# EAGLE board Street_Fighter_v1.1 (EAGLE 7.5.0)
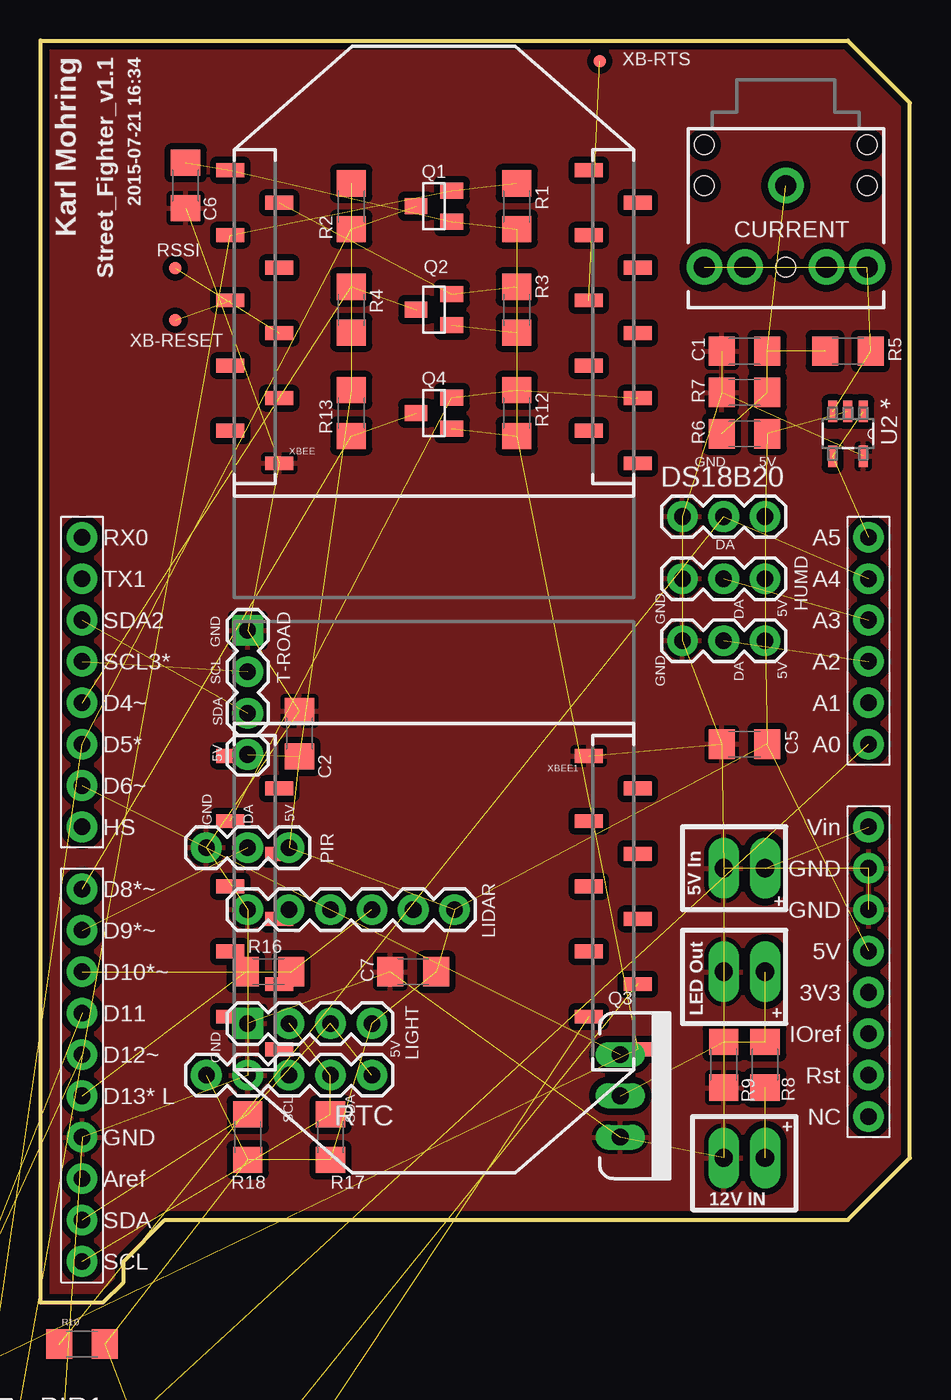
[diagram p0: board, top side]
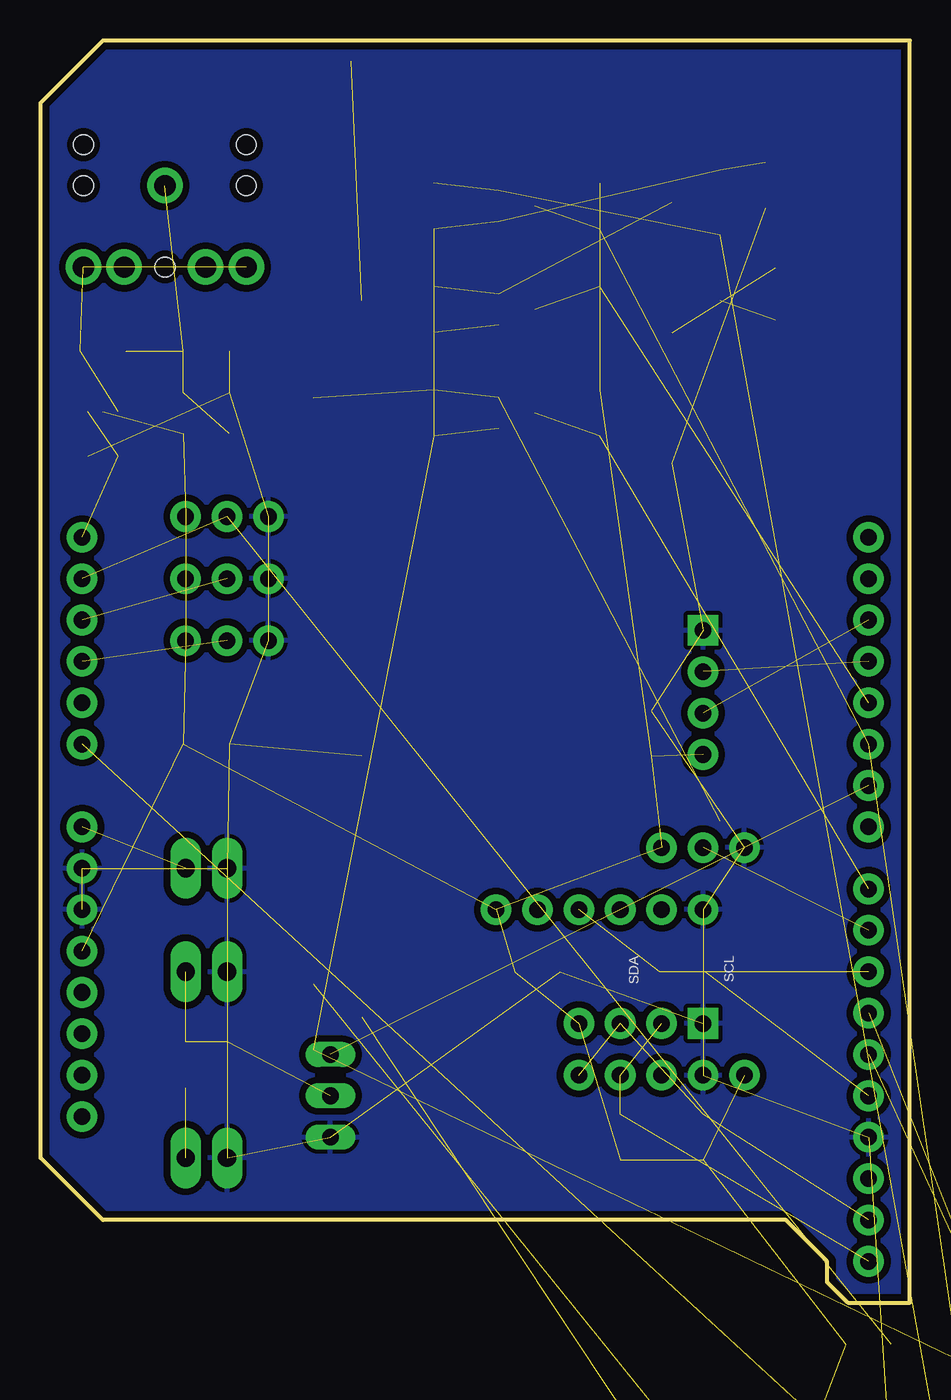
[diagram p1: board, bottom side, seen from below]

Size 53.34 x 77.47 mm. Coordinates in mm from the lower left corner, seen from the top.
Outline: 0,66.04 0,0
Outline: 0,0 3.81,0 5.08,1.27 5.08,2.54 7.62,5.08 49.53,5.08 53.34,8.89 53.34,73.66 49.53,77.47 0,77.47 0,0
Copper layers (1*16): Top 0.035mm / dielectric 1.5mm / Bottom 0.035mm
Design rules "ITEADstudio_DRC": minimum track width 6mil, minimum drill 12mil, track to track 6mil, track to pad 6mil, pad to pad 6mil, via to via 6mil, smd to smd 0mil, copper to edge 10mil, drill to drill 10mil, minimum pad ring 10mil, minimum via ring 6mil, stop-mask expansion 2mil, vias tented up to drill 100mil, thermal gap 10mil

## Footprints (pad centres in the part's own frame; a part is rotated, then mirrored left to right if it is on the bottom)
1206 = smd 1.6 x 1.8: 1 -1.4,0; 2 1.4,0
AUDIO-JACK = drill 1.3 pad 2.184: RING 5,5; RSH 5,2.5; SLEEVE 0,0; TIP 5,-5; TSH 5,-2.5 | hole 1.2: 0,5; -2.5,5; -2.5,-5; 0,-5; 5,0
1X03 = drill 1.016 pad 1.88: 1 0,0; 2 2.54,0; 3 5.08,0
2X3 = drill 1.016 pad 1.88 octagon: 1 0,0; 2 0,2.54; 3 2.54,0; 4 2.54,2.54; 5 5.08,0; 6 5.08,2.54
1X02_LONGPADS = drill 1.118 pad 1.88 long: 1 0,0; 2 2.54,0
1X06 = drill 1.016 pad 1.88: 1 0,0; 2 2.54,0; 3 5.08,0; 4 7.62,0; 5 10.16,0; 6 12.7,0
1X04 = drill 1.016 pad 1.88 square: 1 0,0 | drill 1.016 pad 1.88: 2 2.54,0; 3 5.08,0; 4 7.62,0
SOT23 = smd 1 x 1.4: 1 -0.95,-1.1; 2 0.95,-1.1; 3 0,1.1
TO220V = drill 1.016 long: 1 -2.54,0; 2 0,0; 3 2.54,0
PAD.03X.03 = smd 0.762 x 0.762: P$1 0,0
1X05 = drill 1.016 pad 1.88: 1 0,0; 2 2.54,0; 3 5.08,0; 4 7.62,0; 5 10.16,0
SJ_3_PASTE1&2 = smd 0.635 x 1.27: 1 -0.813,0; 2 0,0; 3 0.813,0
DUEMILANOVE_VIAS = drill 1.016 pad 1.88: 0 2.54,41.91; 1 2.54,39.37; 2 2.54,36.83; 2@1 2.54,0; 3 2.54,34.29; 3@1 2.54,-2.54; 3V3 50.8,13.97; 5 2.54,29.21; 5V 50.8,16.51; 6 2.54,26.67; 7 2.54,24.13; 8 2.54,20.32; 9 2.54,17.78; 10 2.54,15.24; 11 2.54,12.7; 12 2.54,10.16; 13 2.54,7.62; A0 50.8,29.21; A1 50.8,31.75; A2 50.8,34.29; A3 50.8,36.83; A4 50.8,39.37; A5 50.8,41.91; AREF 2.54,2.54; D4 2.54,31.75; GND 2.54,5.08; GND@0 50.8,19.05; GND@1 50.8,21.59; IOREF 50.8,11.43; NC 50.8,6.35; RESET 50.8,8.89; VIN 50.8,24.13
SOT95P270X145-5N = smd 1.321 x 0.559: 1 -1.372,0.94; 2 -1.372,0; 3 -1.372,-0.94; 4 1.372,-0.94; 5 1.372,0.94
SOT223 = smd 1.219 x 2.235: 1 -2.311,-3.099; 2 0,-3.099; 3 2.311,-3.099 | smd 3.6 x 2.2: 4 0,3.099
XBEE-SMD = smd 1.7 x 0.85: 1 -12.5,20; 2 -9.5,18; 3 -12.5,16; 4 -9.5,14; 5 -12.5,12; 6 -9.5,10; 7 -12.5,8; 8 -9.5,6; 9 -12.5,4; 10 -9.5,2; 11 12.5,2; 12 9.5,4; 13 12.5,6; 14 9.5,8; 15 12.5,10; 16 9.5,12; 17 12.5,14; 18 9.5,16; 19 12.5,18; 20 9.5,20

## Placement (x,y rotation side)
C1  10uF  [1206]  43.18,58.42 0 top
C2  10uF  [1206]  15.88,34.92 270 top
C3  10uF  [1206]  -5.08,-15.24 0 top  (outside the outline)
C4  0.1uF  [1206]  -5.08,-19.05 0 top  (outside the outline)
C5  10uF  [1206]  43.18,34.29 0 top
C6  10uF  [1206]  8.89,68.58 90 top
C7  10uF  [1206]  22.86,20.32 0 top
C8  10uF  [1206]  -5.08,-22.86 0 top  (outside the outline)
CURRENT  3.5mm Jack  [AUDIO-JACK]  45.72,68.58 270 top
DS18B20  TMP36  [1X03]  39.37,48.26 0 top
HUMD  HIH-4030  [1X03]  39.37,44.45 0 top
J1  FEMALE 2x3  [2X3]  -50.8,-71.12 0 top  (outside the outline)
JP2  LED Control  [1X02_LONGPADS]  41.91,20.32 0 top
JP3  Power input  [1X02_LONGPADS]  41.91,26.67 0 top
JP4  LED-Reference  [1X02_LONGPADS]  41.91,8.89 0 top
LIDAR  Lidar Lite  [1X06]  12.7,24.13 0 top
LIGHT  BH1750FVI  [1X04]  12.7,17.14 0 top
PIR  MOTION  [1X03]  10.16,27.94 0 top
PIR1  MOTION  [1X03]  1.27,-8.89 0 top  (outside the outline)
Q1  BSS138  [SOT23]  24.13,67.31 90 top
Q2  BSS138  [SOT23]  24.13,60.96 90 top
Q3  FQP30N06L  [TO220V]  35.56,12.7 270 top
Q4  BSS138  [SOT23]  24.13,54.61 90 top
Q5  BSS138  [SOT23]  -6.35,-27.94 0 top  (outside the outline)
Q6  BSS138  [SOT23]  -6.35,-40.64 0 top  (outside the outline)
Q7  BSS138  [SOT23]  -6.35,-53.34 0 top  (outside the outline)
Q8  BSS138  [SOT23]  -2.54,-53.34 0 top  (outside the outline)
Q9  BSS138  [SOT23]  -34.29,-66.04 0 top  (outside the outline)
Q10  BSS138  [SOT23]  -30.48,-66.04 0 top  (outside the outline)
R1  4.7K  [1206]  29.21,67.31 270 top
R2  4.7K  [1206]  19.05,67.31 90 top
R3  4.7K  [1206]  29.21,60.96 270 top
R4  4.7K  [1206]  19.05,60.96 270 top
R5  2K2  [1206]  49.53,58.42 0 top
R6  75K  [1206]  43.18,53.34 0 top
R7  75K  [1206]  43.18,55.88 0 top
R8  15K  [1206]  44.45,14.61 270 top
R9  75K  [1206]  41.91,14.61 90 top
R10  4.7K  [1206]  2.54,-2.54 0 top
R11  4.7K  [1206]  -5.08,-31.75 0 top  (outside the outline)
R12  4.7K  [1206]  29.21,54.61 270 top
R13  4.7K  [1206]  19.05,54.61 90 top
R14  4.7K  [1206]  -5.08,-35.56 0 top  (outside the outline)
R15  4.7K  [1206]  -5.08,-44.45 0 top  (outside the outline)
R16  1K  [1206]  13.97,20.32 0 top
R17  4K7  [1206]  17.78,10.16 270 top
R18  4K7  [1206]  12.7,10.16 270 top
R19  4.7K  [1206]  -5.08,-48.26 0 top  (outside the outline)
R20  4.7K  [1206]  -5.08,-57.15 0 top  (outside the outline)
R21  4.7K  [1206]  0,-57.15 0 top  (outside the outline)
R22  4.7K  [1206]  -5.08,-60.96 0 top  (outside the outline)
R23  4.7K  [1206]  0,-60.96 0 top  (outside the outline)
R24  4.7K  [1206]  -33.02,-69.85 0 top  (outside the outline)
R25  4.7K  [1206]  -27.94,-69.85 0 top  (outside the outline)
R26  4.7K  [1206]  -22.86,-69.85 0 top  (outside the outline)
R27  4.7K  [1206]  -33.02,-73.66 0 top  (outside the outline)
RSSI  TEST-POINT3  [PAD.03X.03]  8.26,63.5 0 top
RTC  DS1307  [1X05]  20.32,13.97 180 top
SJ1  [SJ_3_PASTE1&2]  -38.1,-72.39 0 top  (outside the outline)
SJ2  [SJ_3_PASTE1&2]  -41.91,-72.39 0 top  (outside the outline)
SOUND  MIC  [1X03]  39.37,40.64 0 top
T-ROAD  MLX90614-ACF  [1X04]  12.7,41.27 270 top
U1  ARDUINO_YUN_SHIELDYUN  [DUEMILANOVE_VIAS]  0,5.08 0 top
U2  MCP6231RT-E/OT  [SOT95P270X145-5N]  49.53,53.34 270 top
U3  [SOT223]  -5.08,-7.62 0 top  (outside the outline)
XB-RESET  TEST-POINT3  [PAD.03X.03]  8.26,60.33 0 top
XB-RTS  TEST-POINT3  [PAD.03X.03]  34.29,76.2 0 top
XBEE  XBEE-2B3  [XBEE-SMD]  24.13,49.53 0 top
XBEE1  XBEE-2B3  [XBEE-SMD]  24.13,35.56 180 top

## Library data of the parts
C1-C8 = SparkFun-Capacitors; PROD_ID: CAP-10057
CURRENT DS18B20 HUMD JP2-JP4 LIDAR LIGHT PIR PIR1 RTC SOUND T-ROAD = SparkFun-Connectors
J1 = SparkFun-Connectors; PROD_ID: CONN-11566
Q1 Q2 Q4-Q10 = SparkFun-DiscreteSemi; PROD_ID: TRANS-08345
Q3 = SparkFun-DiscreteSemi; PROD_ID: TRANS-10060
R1-R27 RSSI XB-RESET XB-RTS = SparkFun-Passives
SJ1 SJ2 = SparkFun-Retired
U1 = SparkFun-Boards
U2 = Microchip_By_element14_Batch_1; DESCRIPTION: OP AMP; MPN: MCP6231RT-E/OT; OC_FARNELL: 1840878; OC_NEWARK: 84R5186; PACKAGE: SOT-5; SUPPLIER: Microchip
U3 = SparkFun-PowerIC; PROD_ID: VREG-08170
XBEE XBEE1 = SparkFun-RF; PROD_ID: CONN-09042

## Nets
3V3: U1.3V3
+3V3: C3.2 C4.2 C6.2 Q1.1 Q2.1 Q4.1 Q5.1 Q6.1 Q7.1 Q8.1 Q9.1 Q10.1 R1.2 R3.2 R11.2 R12.2 R15.2 R20.2 R22.2 R24.2 R26.2 U3.2 U3.4 XBEE1.1 XBEE.1
+5V: C2.2 C5.2 C7.2 C8.2 DS18B20.3 HUMD.3 J1.2 LIDAR.6 LIGHT.4 PIR1.3 PIR.3 R2.2 R4.2 R6.2 R10.2 R13.2 R14.2 R17.2 R18.2 R19.2 R21.2 R23.2 R25.2 R27.2 RTC.5 SOUND.3 T-ROAD.4 U1.5V U2.2 U3.3
+12V: JP4.2 R8.2
CURRENT: U1.A5 U2.1 U2.4
GND: C1.1 C2.1 C3.1 C4.1 C5.1 C6.1 C7.1 C8.1 DS18B20.1 HUMD.1 J1.6 JP2.1 JP3.1 JP4.1 LIDAR.1 LIGHT.1 PIR1.1 PIR.1 Q3.3 R7.1 R9.1 RTC.4 SOUND.1 T-ROAD.1 U1.GND U1.GND@0 U1.GND@1 U2.5 U3.1 XBEE1.10 XBEE.10
HANDSHAKE: U1.7
HUMIDITY: HUMD.2 U1.A3
LED-CONTROL: Q3.1 U1.6
LED-CONTROL-OUT: JP2.2 Q3.2 R8.1 R9.2
LIDAR-PWM: LIDAR.4 R16.2 U1.10
LIDAR-TRIG: R16.1 U1.13
MIC: SOUND.2 U1.A2
MISO: J1.1
MOSI: J1.4
MOTION: PIR.2 U1.9
N$2: CURRENT.RING CURRENT.TIP R5.2 U2.3
N$3: SJ1.2
N$4: C1.2 CURRENT.SLEEVE R5.1 R6.1 R7.2
N$5: SJ2.2
RST: J1.5
RX-XB: Q2.3 R4.1 U1.D4
RX-XB2: Q10.3 R27.1 U1.11
RX-YUN: U1.0
SCK: J1.3
SCL: LIGHT.2 R17.1 RTC.2 U1.3@1
SCL@1: T-ROAD.2 U1.3
SDA: LIGHT.3 R18.1 RTC.1 U1.2@1
SDA@1: T-ROAD.3 U1.2
SONAR-PULSEIN: PIR1.2 U1.A0
SQW: RTC.3
TEMP: DS18B20.2 R10.1 U1.A4
TX-XB: Q1.3 Q5.3 Q6.3 Q7.3 Q8.3 R2.1 R14.1 R19.1 R21.1 R23.1 U1.5
TX-XB2: Q9.3 R25.1 U1.12
TX-YUN: U1.1
V+: JP3.2 U1.VIN
XB2-DIN: Q9.2 R24.1 XBEE1.3
XB2-DOUT: Q10.2 R26.1 XBEE1.2
XB2-RSSI: XBEE1.6
XB-ATTN: XBEE.19
XB-CLK: XBEE.18
XB-DTR: XBEE.9
XB-MISO: XBEE.4
XB-MOSI: XBEE.11
XB-RESET: XB-RESET.P$1 XBEE.5
XB-RSSI: RSSI.P$1 XBEE.6
XB-RTS: XB-RTS.P$1 XBEE.16
XB-RX3V: Q2.2 R3.1 XBEE.2
XB-SLEEP: Q4.3 R13.1 U1.8
XB-SLEEP3V: Q4.2 R12.1 XBEE1.13 XBEE.13
XB-SS: XBEE.17
XB-TX3V: Q1.2 Q5.2 Q6.2 Q7.2 Q8.2 R1.1 R11.1 R15.1 R20.1 R22.1 XBEE.3

## Tracks (layer width: path | path; a pad name or v marks a point on that pad's centre or on a via)
+3V3  (24 unrouted)
+5V  (29 unrouted)
+12V  (1 unrouted)
CURRENT  (2 unrouted)
GND  (30 unrouted)
  pour Top (isolate 0.406): 0,0 0,77.47 49.53,77.47 53.34,73.66 53.34,8.89 49.53,5.08 7.62,5.08 5.08,2.54 5.08,1.27 5.08,0
  pour Bottom (isolate 0.406): 0,0 0,77.47 49.53,77.47 53.34,73.66 53.34,8.89 49.53,5.08 7.62,5.08 6.35,3.81 6.35,0
HUMIDITY  (1 unrouted)
LED-CONTROL  (1 unrouted)
LED-CONTROL-OUT  (3 unrouted)
LIDAR-PWM  (2 unrouted)
LIDAR-TRIG  (1 unrouted)
MIC  (1 unrouted)
MOTION  (1 unrouted)
N$2  (3 unrouted)
N$4  (4 unrouted)
RX-XB  (2 unrouted)
RX-XB2  (2 unrouted)
SCL  (3 unrouted)
SCL@1  (1 unrouted)
SDA  (3 unrouted)
SDA@1  (1 unrouted)
SONAR-PULSEIN  (1 unrouted)
TEMP  (2 unrouted)
TX-XB  (10 unrouted)
TX-XB2  (2 unrouted)
V+  (1 unrouted)
XB2-DIN  (2 unrouted)
XB2-DOUT  (2 unrouted)
XB-RESET  (1 unrouted)
XB-RSSI  (1 unrouted)
XB-RTS  (1 unrouted)
XB-RX3V  (2 unrouted)
XB-SLEEP  (2 unrouted)
XB-SLEEP3V  (3 unrouted)
XB-TX3V  (10 unrouted)

## Text on the board
tNames: Karl Mohring | 2015-07-21 16:34 | XB-RTS | RSSI | XB-RESET | GND | 5V | DA | GND | DA | 5V | GND | GND | DA | 5V | SCL | SDA | 5V | GND | DA | 5V | 5V In | + | LED Out | + | 5V | GND | SCL | SDA | + | 12V IN
bNames: SCL | SDA